# EAGLE board stm32-40 (EAGLE 6.4)
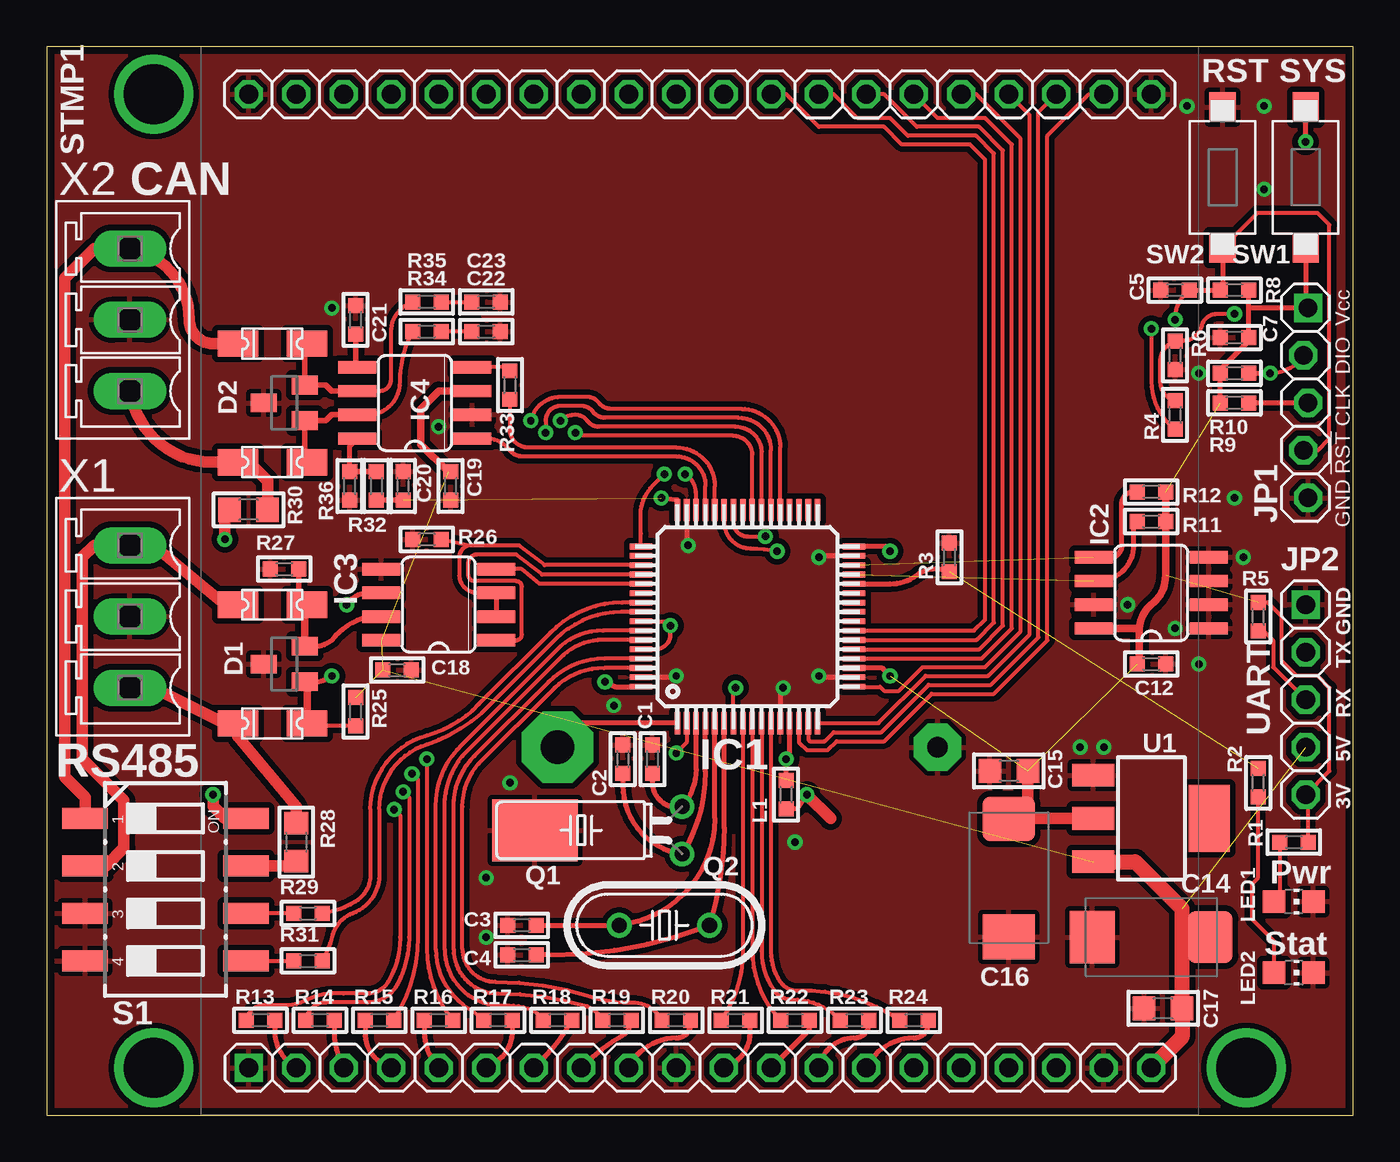
[diagram p0: board, top side]
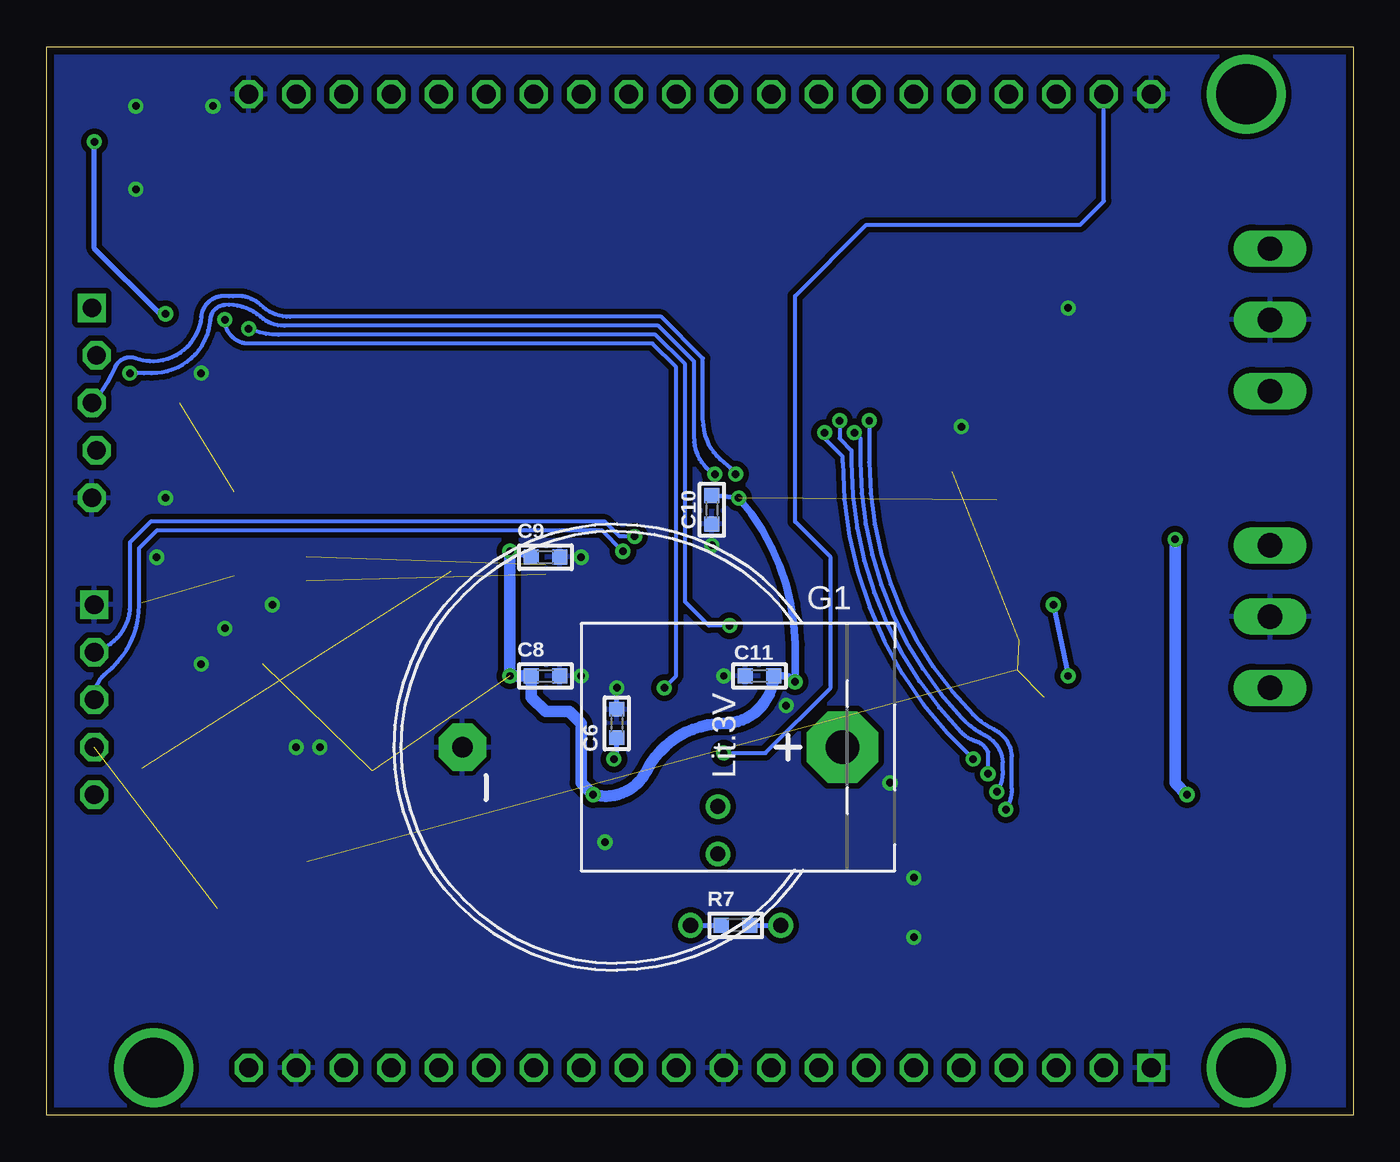
[diagram p1: board, bottom side, seen from below]

Size 69.85 x 57.15 mm. Coordinates in mm from the lower left corner, seen from the top.
Outline: 0,0 69.85,0 69.85,57.15 0,57.15 0,0
Copper layers (1*16): Top 0.035mm / dielectric 1.5mm / Bottom 0.035mm
Design rules "default *": minimum track width 0.16mm, minimum drill 0.4mm, track to track 0.16mm, track to pad 0.16mm, pad to pad 0.16mm, via to via 0.16mm, smd to smd 0.16mm, copper to edge 0.4mm, drill to drill 8mil, minimum pad ring 10mil, minimum via ring 8mil, stop-mask expansion 4mil, vias tented up to drill 0.6mm, thermal gap 10mil

## Footprints (pad centres in the part's own frame; a part is rotated, then mirrored left to right if it is on the bottom)
C0603 = smd 0.8 x 0.8: 1 -0.762,0; 2 0.762,0
SMC_D = smd 2.4 x 2.8: + -3.15,0; - 3.15,0
C0805 = smd 1.2 x 1.3: 1 -1.016,0; 2 1.016,0
SOT23 = smd 1 x 1.4: 1 -0.95,-1.1; 2 0.95,-1.1; 3 0,1.1
1206L = smd 2.16 x 1.4: P$1 -1.85,0; P$2 1.85,0
LITHOLDER = drill 1.803 pad 3.81 octagon: + 0,12.065 | drill 1.118 pad 2.54 octagon: - 0,-8.255
TQFP64 = smd 1.2 x 0.3: 1 -5.7,3.75; 2 -5.7,3.25; 3 -5.7,2.75; 4 -5.7,2.25; 5 -5.7,1.75; 6 -5.7,1.25; 7 -5.7,0.75; 8 -5.7,0.25; 9 -5.7,-0.25; 10 -5.7,-0.75; 11 -5.7,-1.25; 12 -5.7,-1.75; 13 -5.7,-2.25; 14 -5.7,-2.75; 15 -5.7,-3.25; 16 -5.7,-3.75; 33 5.7,-3.75; 34 5.7,-3.25; 35 5.7,-2.75; 36 5.7,-2.25; 37 5.7,-1.75; 38 5.7,-1.25; 39 5.7,-0.75; 40 5.7,-0.25; 41 5.7,0.25; 42 5.7,0.75; 43 5.7,1.25; 44 5.7,1.75; 45 5.7,2.25; 46 5.7,2.75; 47 5.7,3.25; 48 5.7,3.75 | smd 0.3 x 1.2: 17 -3.75,-5.7; 18 -3.25,-5.7; 19 -2.75,-5.7; 20 -2.25,-5.7; 21 -1.75,-5.7; 22 -1.25,-5.7; 23 -0.75,-5.7; 24 -0.25,-5.7; 25 0.25,-5.7; 26 0.75,-5.7; 27 1.25,-5.7; 28 1.75,-5.7; 29 2.25,-5.7; 30 2.75,-5.7; 31 3.25,-5.7; 32 3.75,-5.7; 49 3.75,5.7; 50 3.25,5.7; 51 2.75,5.7; 52 2.25,5.7; 53 1.75,5.7; 54 1.25,5.7; 55 0.75,5.7; 56 0.25,5.7; 57 -0.25,5.7; 58 -0.75,5.7; 59 -1.25,5.7; 60 -1.75,5.7; 61 -2.25,5.7; 62 -2.75,5.7; 63 -3.25,5.7; 64 -3.75,5.7
SO08 = smd 0.66 x 2.032: 1 -1.905,-3.073; 2 -0.635,-3.073; 3 0.635,-3.073; 4 1.905,-3.073; 5 1.905,3.073; 6 0.635,3.073; 7 -0.635,3.073; 8 -1.905,3.073
1X05 = drill 1 square: 1 -5.08,0.127 | drill 1 octagon: 2 -2.54,-0.127; 3 0,0.127; 4 2.54,-0.127; 5 5.08,0.127
UART_1X05 = drill 1 square: 1 -5.08,0 | drill 1 octagon: 2 -2.54,0; 3 0,0; 4 2.54,0; 5 5.08,0
L0603 = smd 0.8 x 0.8: 1 -0.762,0; 2 0.762,0
CHIP-LED0805 = smd 1.2 x 1.2: A 0,-1.05; C 0,1.05
TC38H-G = drill 0.8: 1 -1.27,0; 2 1.27,0 | smd 3.302 x 4.572: GND 0,7.874
HC49/S = drill 0.813: 1 -2.413,0; 2 2.413,0
R0603 = smd 0.8 x 0.8: 1 -0.762,0; 2 0.762,0
R0805 = smd 1.2 x 1.3: 1 -1.016,0; 2 1.016,0
CTS-219-04 = smd 1.13 x 2.44: 1 -3.81,-4.3; 2 -1.27,-4.3; 3 1.27,-4.3; 4 3.81,-4.3; 5 3.81,4.3; 6 1.27,4.3; 7 -1.27,4.3; 8 -3.81,4.3
STAMP-40 = drill 1 square: 1 -24.13,-25.4 | drill 1 octagon: 2 -21.59,-25.4; 3 -19.05,-25.4; 4 -16.51,-25.4; 5 -13.97,-25.4; 6 -11.43,-25.4; 7 -8.89,-25.4; 8 -6.35,-25.4; 9 -3.81,-25.4; 10 -1.27,-25.4; 11 1.27,-25.4; 12 3.81,-25.4; 13 6.35,-25.4; 14 8.89,-25.4; 15 11.43,-25.4; 16 13.97,-25.4; 17 16.51,-25.4; 18 19.05,-25.4; 19 21.59,-25.4; 20 24.13,-25.4; 21 24.13,26.67; 22 21.59,26.67; 23 19.05,26.67; 24 16.51,26.67; 25 13.97,26.67; 26 11.43,26.67; 27 8.89,26.67; 28 6.35,26.67; 29 3.81,26.67; 30 1.27,26.67; 31 -1.27,26.67; 32 -3.81,26.67; 33 -6.35,26.67; 34 -8.89,26.67; 35 -11.43,26.67; 36 -13.97,26.67; 37 -16.51,26.67; 38 -19.05,26.67; 39 -21.59,26.67; 40 -24.13,26.67
KSS-2EG4430 = smd 1.6 x 1.4: 1 -3.75,0; 2 3.75,0
SOT223 = smd 1.219 x 2.235: 1 -2.311,-3.099; 2 0,-3.099; 3 2.311,-3.099 | smd 3.6 x 2.2: 4 0,3.099
MCV3 = drill 1.3 pad 1.905 long: 1 -3.81,0; 2 0,0; 3 3.81,0

## Placement (x,y rotation side)
C1  10pF  [C0603]  32.38,19.05 90 top
C2  10pF  [C0603]  30.8,19.05 90 top
C3  22pF  [C0603]  25.4,10.16 180 top
C4  22pF  [C0603]  25.4,8.57 180 top
C5  0.1  [C0603]  60.33,44.13 180 top
C6  0.1  [C0603]  39.37,20.95 90 bottom
C7  0.1  [C0603]  63.5,41.59 180 top
C8  0.1  [C0603]  43.18,23.5 0 bottom
C9  0.1  [C0603]  43.18,29.84 0 bottom
C10  0.1  [C0603]  34.29,32.38 270 bottom
C11  0.1  [C0603]  31.75,23.5 180 bottom
C12  0.1  [C0603]  59.05,24.13 0 top
C14  100uF/6V3  [SMC_D]  59.05,9.53 180 top
C15  0.1  [C0805]  51.44,18.41 180 top
C16  100uF/6V3  [SMC_D]  51.44,12.7 270 top
C17  0.1  [C0805]  59.69,5.71 180 top
C18  0.1  [C0603]  18.73,23.81 0 top
C19  0.1  [C0603]  21.59,33.66 270 top
C20  0.1  [C0603]  19.05,33.66 90 top
C21  0.1  [C0603]  16.51,42.55 90 top
C22  560pF  [C0603]  23.5,41.91 0 top
C23  560pF  [C0603]  23.5,43.5 0 top
D1  PESD1CAN  [SOT23]  12.7,24.13 90 top
D2  PESD1CAN  [SOT23]  12.7,38.1 90 top
F1  0.2A  [1206L]  12.06,27.3 180 top
F2  0.2A  [1206L]  12.06,20.95 180 top
F3  0.2A  [1206L]  12.06,34.92 180 top
F4  0.2A  [1206L]  12.06,41.27 180 top
G1  [LITHOLDER]  39.37,19.68 270 bottom
IC1  STM32F103RBT6  [TQFP64]  37.47,26.67 90 top
IC2  CAT24M01WI-GT3  [SO08]  59.05,27.94 90 top
IC3  MAX487-S  [SO08]  20.95,27.3 90 top
IC4  AMIS30663CANG2G  [SO08]  19.68,38.1 90 top
JP1  [1X05]  67.31,38.1 270 top
JP2  [UART_1X05]  67.31,22.23 270 top
L1  bead  [L0603]  39.53,17.14 90 top
LED1  [CHIP-LED0805]  66.67,11.43 270 top
LED2  [CHIP-LED0805]  66.67,7.62 270 top
Q1  32768Hz  [TC38H-G]  33.97,15.24 90 top
Q2  8MHz  [HC49/S]  33.02,10.16 0 top
R1  220  [R0603]  66.67,14.61 180 top
R2  220  [R0603]  64.77,17.78 270 top
R3  10K  [R0603]  48.26,29.84 90 top
R4  10K  [R0603]  60.32,37.47 90 top
R5  10K  [R0603]  64.77,26.67 90 top
R6  2.2K  [R0603]  60.32,40.64 90 top
R7  1M  [R0603]  33.02,10.16 0 bottom
R8  10K  [R0603]  63.5,44.13 0 top
R9  10K  [R0603]  63.5,38.1 180 top
R10  10K  [R0603]  63.5,39.69 180 top
R11  4.7K  [R0603]  59.05,31.75 0 top
R12  4.7K  [R0603]  59.05,33.34 0 top
R13  10  [R0603]  11.43,5.08 180 top
R14  10  [R0603]  14.61,5.08 180 top
R15  10  [R0603]  17.78,5.08 0 top
R16  10  [R0603]  20.95,5.08 0 top
R17  10  [R0603]  24.13,5.08 180 top
R18  10  [R0603]  27.3,5.08 180 top
R19  10  [R0603]  30.48,5.08 180 top
R20  10  [R0603]  33.66,5.08 180 top
R21  10  [R0603]  36.83,5.08 180 top
R22  10  [R0603]  40.01,5.08 180 top
R23  10  [R0603]  43.18,5.08 180 top
R24  10  [R0603]  46.35,5.08 180 top
R25  560  [R0603]  16.51,21.59 90 top
R26  10K  [R0603]  20.32,30.8 0 top
R27  560  [R0603]  12.7,29.21 0 top
R28  120  [R0805]  13.34,14.61 270 top
R29  330  [R0603]  13.97,10.79 0 top
R30  120  [R0805]  10.79,32.38 180 top
R31  330  [R0603]  13.97,8.26 0 top
R32  0  [R0603]  17.62,33.66 90 top
R33  100  [R0603]  24.77,39.05 90 top
R34  100  [R0603]  20.32,41.91 180 top
R35  100  [R0603]  20.32,43.5 180 top
R36  NC  [R0603]  16.19,33.66 90 top
S1  219-04  [CTS-219-04]  6.35,12.06 270 top
STMP1  STAMP-40  [STAMP-40]  34.92,27.94 0 top
SW1  KSS-2EG4430  [KSS-2EG4430]  67.31,50.16 270 top
SW2  KSS-2EG4430  [KSS-2EG4430]  62.87,50.16 270 top
U1  [SOT223]  59.05,15.88 270 top
X1  MCV3  [MCV3]  4.45,26.67 90 top
X2  MCV3  [MCV3]  4.45,42.55 90 top

## Library data of the parts
C1-C12 C14-C23 L1 R1-R36 = rc-master-smd
D1 D2 = protect
F1-F4 = ptc-littlefuse
G1 = battery
IC1 = stm32
IC2 = stm32-by-pb
IC3 = rs232-rs485
IC4 = interfaces
JP1 = jtag
JP2 STMP1 = stamp
LED1 LED2 = led
Q1 = crystal
Q2 = discrete
S1 = switch-dil
SW1 SW2 = buttons
U1 = vreg-linear
X1 X2 = con-phoenix-381_l

## Nets
!RESET: C5.1 IC1.7 JP1.4 R8.1 SW2.2
+3V3: C7.1 C8.1 C9.1 C10.1 C11.1 C12.1 C15.1 C16.+ C20.1 IC1.19 IC1.32 IC1.48 IC1.64 IC2.8 JP1.1 JP2.5 L1.1 R1.1 R5.2 R8.2 R9.2 R10.2 R11.2 R12.2 R32.1 SW1.2 U1.2
+5V: C14.+ C17.1 C18.1 C19.1 IC3.8 IC4.3 JP2.4 R25.2 STMP1.20 U1.3
BOOT0: IC1.57 IC1.60 R4.1
BOOT1: IC1.28 R2.1 R3.1
CAN_CTRL: IC4.8 R32.2 R36.2
CAN_H: F3.P$2 R30.1 X2.1
CAN_L: F4.P$2 S1.1 X2.3
CAN_RX: IC1.44 R33.1
CAN_TX: IC1.45 IC4.1
DE3: IC1.53 IC3.4
GND: C1.2 C2.2 C3.2 C4.2 C5.2 C6.2 C7.2 C8.2 C9.2 C10.2 C11.2 C12.2 C14.- C15.2 C16.- C17.2 C18.2 C19.2 C20.2 C21.2 C22.2 C23.2 D1.3 D2.3 G1.- IC1.12 IC1.18 IC1.31 IC1.47 IC1.63 IC2.1 IC2.2 IC2.3 IC2.4 IC2.7 IC3.5 IC4.2 JP1.5 JP2.1 LED1.C LED2.C Q1.GND R3.2 R6.1 R26.1 R27.1 R36.1 S1.3 S1.4 STMP1.1 STMP1.10 STMP1.19 STMP1.21 STMP1.40 SW2.1 U1.1 X1.2 X2.2
N$1: C21.1 IC4.5
N$2: R30.2 S1.8
N$3: R4.2 R6.2 SW1.1
N$6: D1.2 F1.P$1 IC3.7 R27.2
N$7: IC4.4 R33.2
N$8: R28.2 S1.7
N$9: R29.1 S1.6
N$10: R31.1 S1.5
N$11: R21.1 STMP1.11
N$13: LED1.A R1.2
N$14: R22.1 STMP1.12
N$15: R13.1 STMP1.2
N$16: R14.1 STMP1.3
N$17: R15.1 STMP1.4
N$18: R16.1 STMP1.5
N$19: R17.1 STMP1.6
N$20: R18.1 STMP1.7
N$21: R19.1 STMP1.8
N$22: R20.1 STMP1.9
N$23: R23.1 STMP1.13
N$24: R24.1 STMP1.14
N$30: LED2.A R2.2
N$44: D1.1 F2.P$1 IC3.6 R25.1
N$51: D2.1 F3.P$1 IC4.7 R34.2
N$52: D2.2 F4.P$1 IC4.6 R35.2
N$54: C23.1 R35.1
N$55: C22.1 R34.1
OSC32_IN: C1.1 IC1.3 Q1.2
OSC32_OUT: C2.1 IC1.4 Q1.1
OSC_IN: C3.1 IC1.5 Q2.1 R7.2
OSC_OUT: C4.1 IC1.6 Q2.2 R7.1
PA0: IC1.14 STMP1.22
PA1: IC1.15 STMP1.23
PA2: IC1.16 STMP1.24
PA3: IC1.17 STMP1.25
PA4: IC1.20 STMP1.26
PA5: IC1.21 STMP1.27
PA6: IC1.22 STMP1.28
PA7: IC1.23 STMP1.29
PA8: IC1.41
PB0: IC1.26
PB1: IC1.27
PC0: IC1.8 R21.2
PC1: IC1.9 R22.2
PC2: IC1.10 R23.2
PC3: IC1.11 R24.2
PC4: IC1.24
PC5: IC1.25
PC13: IC1.2 STMP1.39
PD2: IC1.54
RS485_A: F2.P$2 R28.1 X1.1
RS485_B: F1.P$2 S1.2 X1.3
RXD1: IC1.43 JP2.3 R5.1
RXD3: IC1.52 IC3.1
SCL2: IC1.29 IC2.6 R11.1
SDA2: IC1.30 IC2.5 R12.1
SPI2_MISO: IC1.35
SPI2_MOSI: IC1.36
SPI2_NSS: IC1.33
SPI2_SCLK: IC1.34
SW3: IC1.55 R29.2
SW4: IC1.56 R31.2
SWCLK: IC1.49 JP1.3 R9.1
SWDIO: IC1.46 JP1.2 R10.1
TIM3_CH1: IC1.37 R13.2
TIM3_CH2: IC1.38 R14.2
TIM3_CH3: IC1.39 R15.2
TIM3_CH4: IC1.40 R16.2
TIM4_CH1: IC1.58 R17.2
TIM4_CH2: IC1.59 R18.2
TIM4_CH3: IC1.61 R19.2
TIM4_CH4: IC1.62 R20.2
TXD1: IC1.42 JP2.2
TXD3: IC1.51 IC3.2 IC3.3 R26.2
VBAT: G1.+ IC1.1
VDDA: C6.1 IC1.13 L1.2

## Tracks (layer width: path | path; a pad name or v marks a point on that pad's centre or on a via)
!RESET  (via drill 0.4)
  Top 0.203: JP1.4 67.94,35.56 68.58,36.2 68.58,47.62 67.94,48.26 64.71,48.26 SW2.2 | IC1.7 36.72,22.75 v36.83,22.86 | v60.33,42.55 arc-51 C5.1
  Top 0.254: C5.1 R8.1 | R8.1 | SW2.2 62.87,44.26 R8.1
  Bottom 0.203: v36.83,22.86 36.2,23.5 36.2,40.01 37.47,41.27 59.05,41.27 arc90 v60.33,42.55
+3V3  (via drill 0.4)  (5 unrouted)
  Top 0.203: R1.1 67.44,17.02 JP2.5 68.58,18.41 68.58,22.86 67.94,23.5 66.83,23.5 66.04,24.29 66.04,26.67 65.28,27.43 R5.2
  Top 0.254: IC1.64 30.42,22.92 v29.84,23.18 | IC1.19 44.66,23.92 v45.09,23.5 | IC1.32 45.02,30.42 v45.09,30.16 | IC1.48 33.72,32.92 v32.86,33.02 | L1.1 40.13,16.38 v40.64,17.14 | R9.2 R10.2 62.74,39.88 64.26,41.4 C7.1 64.26,43.18 | 58.42,24.26 C12.1 | 64.26,43.18 R8.2 | 64.26,43.18 JP1.1 67.31,43.31 SW1.2
  Top 0.305: R32.1 C20.1
  Top 0.406: R12.2 R11.2 59.82,28.86 arc-52 59.05,27.3 arc51 58.42,26.04 | IC2.8 58.42,26.04 | 58.42,26.04 58.42,24.26
  Top 0.61: 41.91,15.88 v40.64,17.14 | U1.2 51.46,15.88 C16.+ 52.45,16.87 C15.1
  Bottom 0.254: v45.09,30.16 C9.1 | v32.86,33.02 C10.1
  Bottom 0.406: v32.86,33.02 arc44 29.84,24.13 v29.84,23.18 arc-53 30.48,23.5 C11.1
  Bottom 0.61: v45.09,30.16 v45.09,23.5 C8.1 43.94,22.35 43.18,21.59 41.91,21.59 41.27,20.95 41.27,17.78 v40.64,17.14 | v40.64,17.14 | C11.1 arc87 33.66,20.95 arc-63 37.78,18.41 arc79 v40.64,17.14
+5V  (5 unrouted)
  Top 0.406: IC4.3 20.95,38.73 20,37.78 20,35.88 21.46,34.42 C19.1
  Top 0.813: STMP1.20 60.71,4.19 C17.1 60.71,9.53 | 60.71,9.53 60.71,11.05 58.19,13.56 U1.3 | C14.+ 60.71,9.53
BOOT0  (via drill 0.4)
  Top 0.203: IC1.60 32.54,24.92 arc90 33.34,25.72 v33.34,26.19 33.11,26.42 IC1.57 | v59.05,42.07 59.05,39.24 arc53 R4.1
  Bottom 0.203: v33.34,26.19 34.45,26.19 35.72,27.46 35.72,40.16 37.31,41.75 57.47,41.75 arc23 v59.05,42.07
BOOT1  (1 unrouted)
  Top 0.254: IC1.28 45.09,28.42 arc37 46.51,28.89 arc-61 R3.1
CAN_CTRL
  Top 0.254: R36.2 16.19,35.78 IC4.8
  Top 0.305: R36.2 R32.2
CAN_H
  Top 0.61: R30.1 11.81,33.91 10.79,34.92 F3.P$2 8.89,34.92 arc-81 X2.1
CAN_L
  Top 0.61: S1.1 2.05,17 0.95,18.1 0.95,44.77 2.54,46.35 X2.3 arc-80 7.62,42.55 arc90 8.89,41.27 F4.P$2
CAN_RX
  Top 0.203: IC1.44 35.72,33.66 arc90 33.66,35.72 25.72,35.72 arc-90 24.77,36.67 R33.1
CAN_TX
  Top 0.203: IC1.45 35.22,33.66 arc91 33.66,35.24 25.4,35.24 arc-53 24.77,35.56 arc53 23.5,36.2 IC4.1
DE3
  Top 0.203: IC1.53 26.36,28.42 25.4,29.21 IC3.4
GND  (via drill 0.4)
  Top 0.254: IC1.31 41.35,29.92 v41.27,29.84 | IC1.47 34.22,30.55 v34.29,30.48 | IC1.63 33.58,23.42 v33.66,23.5 | IC1.18 41.35,23.42 v41.27,23.5 | IC1.12 39.22,22.7 v39.37,22.86
  Bottom 0.254: C6.2 v39.37,22.86
  other vias: 60.96,53.97 65.09,49.53 65.09,53.98 24.77,17.78 40,14.61 55.24,19.69 15.24,43.18 23.5,12.7 23.5,9.53 56.52,19.69 61.59,24.13 60.33,26.04 57.78,27.3 20.95,36.83 30.32,21.91 61.59,39.69 63.5,33.02 63.98,29.84
  pour Top (isolate 0.305): 70.48,-0.64 -0.64,-0.64 -0.64,57.78 70.48,57.78
  pour Bottom (isolate 0.305): 71.12,-1.27 -1.27,-1.27 -1.27,58.42 71.12,58.42
N$1
  Top 0.305: C21.1 16.51,40.11 IC4.5
N$2  (via drill 0.4)
  Top 0.61: v8.89,17.14 8.89,16.51 9.53,15.88 S1.8 | v9.53,30.8 9.53,32.13 R30.2
  Bottom 0.61: v9.53,30.8 9.53,17.78 v8.89,17.14
N$3  (via drill 0.4)
  Top 0.203: 60.2,38.23 R4.2 arc-78 59.53,39.21 59.53,40.32 arc-73 R6.2 | R6.2 60.29,41.4 | R6.2 60.8,41.43 arc72 61.75,42.23 arc-74 62.55,42.86 arc-3 v63.5,42.86
  Top 0.254: v67.31,52.07 SW1.1
  Bottom 0.254: v63.5,42.86 63.82,42.86 67.31,46.35 v67.31,52.07
N$4  (via drill 3.2)
  other vias: 5.71,54.61
N$5  (via drill 3.2)
  other vias: 64.14,2.54
N$6
  Top 0.254: IC3.7 17.14,26.67 arc37 15.24,25.4 arc-49 D1.2 14.29,25.08
  Top 0.305: R27.2 13.46,27.76 F1.P$1
  Top 0.406: D1.2 13.8,27.19 F1.P$1
N$7
  Top 0.203: IC4.4 24.57,40.01 R33.2
N$8
  Top 0.61: S1.7 13.08,13.34 R28.2
N$9
  Top 0.203: R29.1 S1.6
N$10
  Top 0.203: S1.5 R31.1
N$11
  Top 0.254: R21.1 37.59,4.41 arc-73 STMP1.11
N$12  (via drill 3.2)
  other vias: 5.71,2.54
N$13
  Top 0.203: R1.2 65.91,11.72 LED1.A
N$14
  Top 0.254: R22.1 40.77,4.57 STMP1.12
N$15
  Top 0.254: R13.1 12.19,4.48 arc61 STMP1.2
N$16
  Top 0.254: R14.1 15.37,4.48 arc29 STMP1.3
N$17
  Top 0.254: R15.1 17.02,4.41 arc73 STMP1.4
N$18
  Top 0.254: R16.1 20.19,4.41 arc44 STMP1.5
N$19
  Top 0.254: R17.1 24.89,4.57 arc-69 STMP1.6
N$20
  Top 0.254: STMP1.7 26.64,3.14 arc17 R18.1
N$21
  Top 0.254: STMP1.8 28.7,2.67 arc-15 30.8,4.29 arc61 R19.1
N$22
  Top 0.254: R20.1 arc-103 33.66,4.13 arc64 STMP1.9
N$23
  Top 0.254: R23.1 arc-103 43.18,4.13 arc80 STMP1.13
N$24
  Top 0.254: R24.1 arc-103 46.35,4.13 arc64 STMP1.14
N$30
  Top 0.203: LED2.A 65.62,9.3 64.45,10.48 64.45,12.38 64.77,12.7 R2.2
N$44  (via drill 0.4)
  Top 0.203: R25.1 14.04,20.83 F2.P$1
  Top 0.254: IC3.6 17.14,27.94 arc53 v16.03,27.3 | D1.1 14.29,23.18 arc37 v15.24,23.5
  Top 0.406: F2.P$1 13.91,23.07 D1.1
  Bottom 0.254: v16.03,27.3 v15.24,23.5
N$51
  Top 0.203: IC4.7 17.14,37.47 arc90 18.89,39.21 arc-28 R34.2
  Top 0.305: F3.P$1 13.8,34.72 D2.1 14.93,37.15 15.24,37.47 IC4.7
N$52
  Top 0.203: IC4.6 17.78,38.73 arc90 18.41,39.37 18.41,41.91 arc-72 R35.2
  Top 0.305: F4.P$1 13.8,41.48 D2.2 14.93,39.05 15.24,38.73 IC4.6
N$54
  Top 0.203: R35.1 C23.1
N$55
  Top 0.203: C22.1 R34.1
OSC32_IN
  Top 0.254: IC1.3 34.72,18.52 arc-41 Q1.2 arc-103 32.38,17.78 C1.1
OSC32_OUT
  Top 0.254: IC1.4 35.22,18.39 arc-31 Q1.1 arc-82 30.8,17.62 C2.1
OSC_IN
  Top 0.254: IC1.5 35.72,15.88 arc-84 Q2.1 C3.1
  Bottom 0.254: R7.2 Q2.1
OSC_OUT
  Top 0.254: IC1.6 36.22,15.39 arc-17 Q2.2 arc-21 26.86,8.57 C4.1
  Bottom 0.254: Q2.2 R7.1
PA0
  Top 0.203: IC1.14 40.22,19.95 40.64,19.53 41.75,19.53 42.23,20 44.77,20 47.31,22.54 50.64,22.54 53.5,25.4 53.5,52.39 55.72,54.61 STMP1.22
PA1
  Top 0.203: IC1.15 40.72,20.09 40.8,20 41.59,20 42.07,20.48 44.61,20.48 47.15,23.02 50.48,23.02 53.02,25.56 53.02,53.66 STMP1.23
PA2
  Top 0.203: IC1.16 44.47,20.97 46.99,23.5 50.32,23.5 52.55,25.72 52.55,53.5 STMP1.24
PA3
  Top 0.203: IC1.17 44.55,22.92 44.77,22.7 45.56,22.7 46.83,23.97 50.16,23.97 52.07,25.88 52.07,52.23 49.69,54.61 STMP1.25
PA4
  Top 0.203: IC1.20 49.98,24.42 51.59,26.04 51.59,51.91 50.16,53.34 47.62,53.34 STMP1.26
PA5
  Top 0.203: IC1.21 49.84,24.92 51.12,26.19 51.12,51.59 49.85,52.86 46.51,52.86 44.77,54.61 STMP1.27
PA6
  Top 0.203: IC1.22 49.71,25.42 50.64,26.35 50.64,51.44 49.69,52.39 46.04,52.39 45.09,53.34 43.34,53.34 42.07,54.61 STMP1.28
PA7
  Top 0.203: IC1.23 49.57,25.92 50.16,26.51 50.16,51.12 49.37,51.91 45.72,51.91 44.77,52.86 41.27,52.86 39.53,54.61 STMP1.29
PC0
  Top 0.203: IC1.8 37.22,8.8 arc-34 R21.2
PC1
  Top 0.203: IC1.9 37.72,8.8 arc45 R22.2 39.24,5.21
PC2
  Top 0.203: IC1.10 38.22,8.78 arc36 38.89,6.67 arc55 39.85,6.19 arc-49 R23.2
PC3
  Top 0.203: 45.59,5.21 R24.2 arc38 40.16,6.67 arc-58 39.21,7.14 arc-34 38.72,8.75 IC1.11
PC13  (via drill 0.4)
  Top 0.203: IC1.2 34.22,19.93 v33.66,19.37
  Bottom 0.203: v33.66,19.37 31.43,19.37 27.94,22.86 27.94,29.84 29.84,31.75 29.84,43.81 26.04,47.62 14.61,47.62 13.34,48.9 STMP1.39
RS485_A
  Top 0.61: X1.1 5.71,22.86 9.53,20.95 F2.P$2 10.21,20.27 13.34,16.51 R28.1
RS485_B
  Top 0.61: S1.2 3.17,13.34 4.13,14.29 4.13,16.83 1.91,19.05 1.91,29.84 2.54,30.48 X1.3 5.71,30.48 9.53,27.3 F1.P$2
RXD1  (via drill 0.4)
  Top 0.203: IC1.43 36.22,31.73 arc90 37.62,30.32 arc-13 v39.05,30.16 | R5.1 65.06,25.91 65.56,25.4 65.56,23.97 JP2.3
  Bottom 0.203: v39.05,30.16 40.16,31.27 63.98,31.27 64.93,30.32 64.93,27.3 arc51 66.67,23.65 arc-54 JP2.3
RXD3
  Top 0.203: IC3.1 25.08,25.4 arc90 25.4,25.72 25.4,28.26 arc90 25.08,28.57 22.86,28.57 arc-90 22.54,28.89 22.54,29.53 arc-90 23.02,30 25.08,30 26.48,28.92 IC1.52
SCL2  (1 unrouted)
  Top 0.254: R11.1 58.1,31.56 58.1,30.48 arc-96 IC2.6
SDA2  (1 unrouted)
  Top 0.254: IC2.5 56.52,29.84 arc113 57.47,30.48 57.47,32.7 arc-105 R12.1
SW3
  Top 0.203: IC1.55 30.75,27.42 arc46 26.91,25.8 23.1,21.99 arc-31 20.32,20.32 arc74 17.3,16.35 17.3,12.86 arc-58 16.51,11.43 arc-24 R29.2
SW4
  Top 0.203: IC1.56 30.73,26.92 arc45 27.23,25.48 23.73,21.99 arc-28 20.32,19.84 arc72 17.78,16.35 17.78,12.86 arc-69 16.35,10.79 arc56 15.24,9.53 arc-18 R31.2
SWCLK  (via drill 0.4)
  Top 0.203: IC1.49 31.77,31.1 31.75,31.11 31.75,32.38 arc-37 32.38,33.66 v33.02,34.29
  Top 0.254: JP1.3 R9.1
  Bottom 0.203: v33.02,34.29 arc-16 33.66,34.92 arc53 34.77,37.15 34.77,40.48 36.99,42.7 56.83,42.7 arc44 58.42,43.34 arc-46 59.69,43.81 arc5 60.33,43.81 arc-87 61.59,42.7 arc83 64.14,40.32 arc22 65.09,40.48 arc-87 66.2,40.01 arc20 JP1.3
SWDIO  (via drill 0.4)
  Top 0.203: IC1.46 34.72,33.23 arc58 v34.13,34.29 | v65.41,39.69 arc56 JP1.2
  Top 0.254: R10.1 v65.41,39.69
  Bottom 0.203: v34.13,34.29 arc61 35.24,36.2 35.24,40.32 37.15,42.23 57.15,42.23 arc41 58.42,42.7 arc-45 60.33,43.34 arc-82 61.12,42.55 arc87 R10.1 arc-2 v65.41,39.69
TIM3_CH1  (via drill 0.4)
  Top 0.203: IC1.37 39.22,35.72 arc90 37.15,37.78 30.16,37.78 arc-53 29.53,38.1 arc53 28.89,38.42 27.46,38.42 arc77 v25.88,37.15 | v18.57,16.35 18.89,16.03 18.89,9.53 arc-30 18.26,7.14 arc-61 17.14,6.51 arc1 15.24,6.51 arc27 13.97,6.19 arc-27 12.7,5.87 arc-1 11.59,5.87 arc83 R13.2
  Bottom 0.203: v25.88,37.15 25.88,34.92 arc-45 20.32,21.43 arc-19 19.21,20.64 arc61 18.26,19.21 18.26,17.46 arc32 v18.57,16.35
TIM3_CH2  (via drill 0.4)
  Top 0.203: IC1.38 38.72,35.58 arc90 36.99,37.31 29.84,37.31 arc-53 29.21,37.62 arc53 28.57,37.94 27.46,37.94 arc90 26.67,37.15 v26.67,36.51 | v19.05,17.3 19.37,16.99 19.37,9.53 arc-28 18.73,6.99 arc-62 17.14,6.03 14.92,6.03 arc83 R14.2
  Bottom 0.203: v26.67,36.51 26.35,36.2 26.35,34.92 arc-43 20.95,21.27 arc-20 19.68,20.32 arc59 18.73,18.89 18.73,18.41 arc32 v19.05,17.3
TIM3_CH3  (via drill 0.4)
  Top 0.203: IC1.39 38.22,35.45 arc90 36.83,36.83 29.53,36.83 arc-53 28.89,37.15 arc53 28.26,37.47 arc44 v27.46,37.15 | v19.53,18.26 19.84,17.94 19.84,9.53 arc-33 R15.2
  Bottom 0.203: v19.53,18.26 19.53,19.37 arc-58 20.16,20 arc30 20.95,20.48 arc44 26.83,34.92 26.83,35.56 27.46,36.2 v27.46,37.15
TIM3_CH4  (via drill 0.4)
  Top 0.203: IC1.40 37.72,35.31 arc90 36.67,36.35 28.42,36.35 v28.26,36.51 | v20.32,19.05 20.32,8.89 arc40 R16.2
  Bottom 0.203: v28.26,36.51 28.26,36.2 27.3,35.24 27.3,34.92 arc-47 v20.32,19.05
TIM4_CH1
  Top 0.203: IC1.58 29.73,25.92 arc41 27.46,25.08 22.23,19.84 arc46 20.8,16.51 20.8,8.89 arc58 22.54,5.71 arc-10 R17.2
TIM4_CH2
  Top 0.203: IC1.59 29.71,25.42 arc43 27.62,24.61 22.23,19.21 arc39 21.27,16.51 21.27,8.89 arc93 24.45,5.87 arc-20 25.72,5.71 arc-41 R18.2
TIM4_CH3
  Top 0.203: IC1.61 29.82,24.42 arc45 26.83,23.18 22.86,19.21 arc45 21.75,16.51 21.75,8.89 arc90 24.13,6.51 arc-16 28.73,5.87 arc-46 R19.2
TIM4_CH4
  Top 0.203: IC1.62 29.79,23.92 arc44 27.15,22.86 23.1,18.81 arc42 22.23,16.51 22.23,8.89 arc90 23.97,7.14 arc-18 29.05,6.35 arc19 31.27,6.03 arc-64 R20.2
TXD1  (via drill 0.4)
  Top 0.203: IC1.42 36.72,31.71 arc90 37.47,30.96 v38.42,30.96
  Bottom 0.203: v38.42,30.96 39.21,30.96 40.01,31.75 64.29,31.75 65.41,30.64 65.41,27.3 arc74 JP2.2
TXD3
  Top 0.203: IC3.3 23.02,27.94 arc-90 22.07,28.89 22.07,29.84 arc-74 22.54,30.48 | IC1.51 26.62,29.42 25.24,30.48 22.54,30.48 | 22.54,30.48 R26.2
  Top 0.254: IC3.3 IC3.2
VBAT
  Top 0.254: 33.7,20.95 IC1.1 27.95,20.97 G1.+
VDDA  (via drill 0.4)
  Top 0.254: IC1.13 39.72,19.39 v39.53,19.05 L1.2
  Bottom 0.254: C6.1 39.37,19.21 v39.53,19.05

## Text on the board
tPlace: RST | SYS | CAN | RS485 | Pwr | Stat